# EAGLE board Big_Red_Box_Proto_Board (EAGLE 7.2.0), part 1 of 2
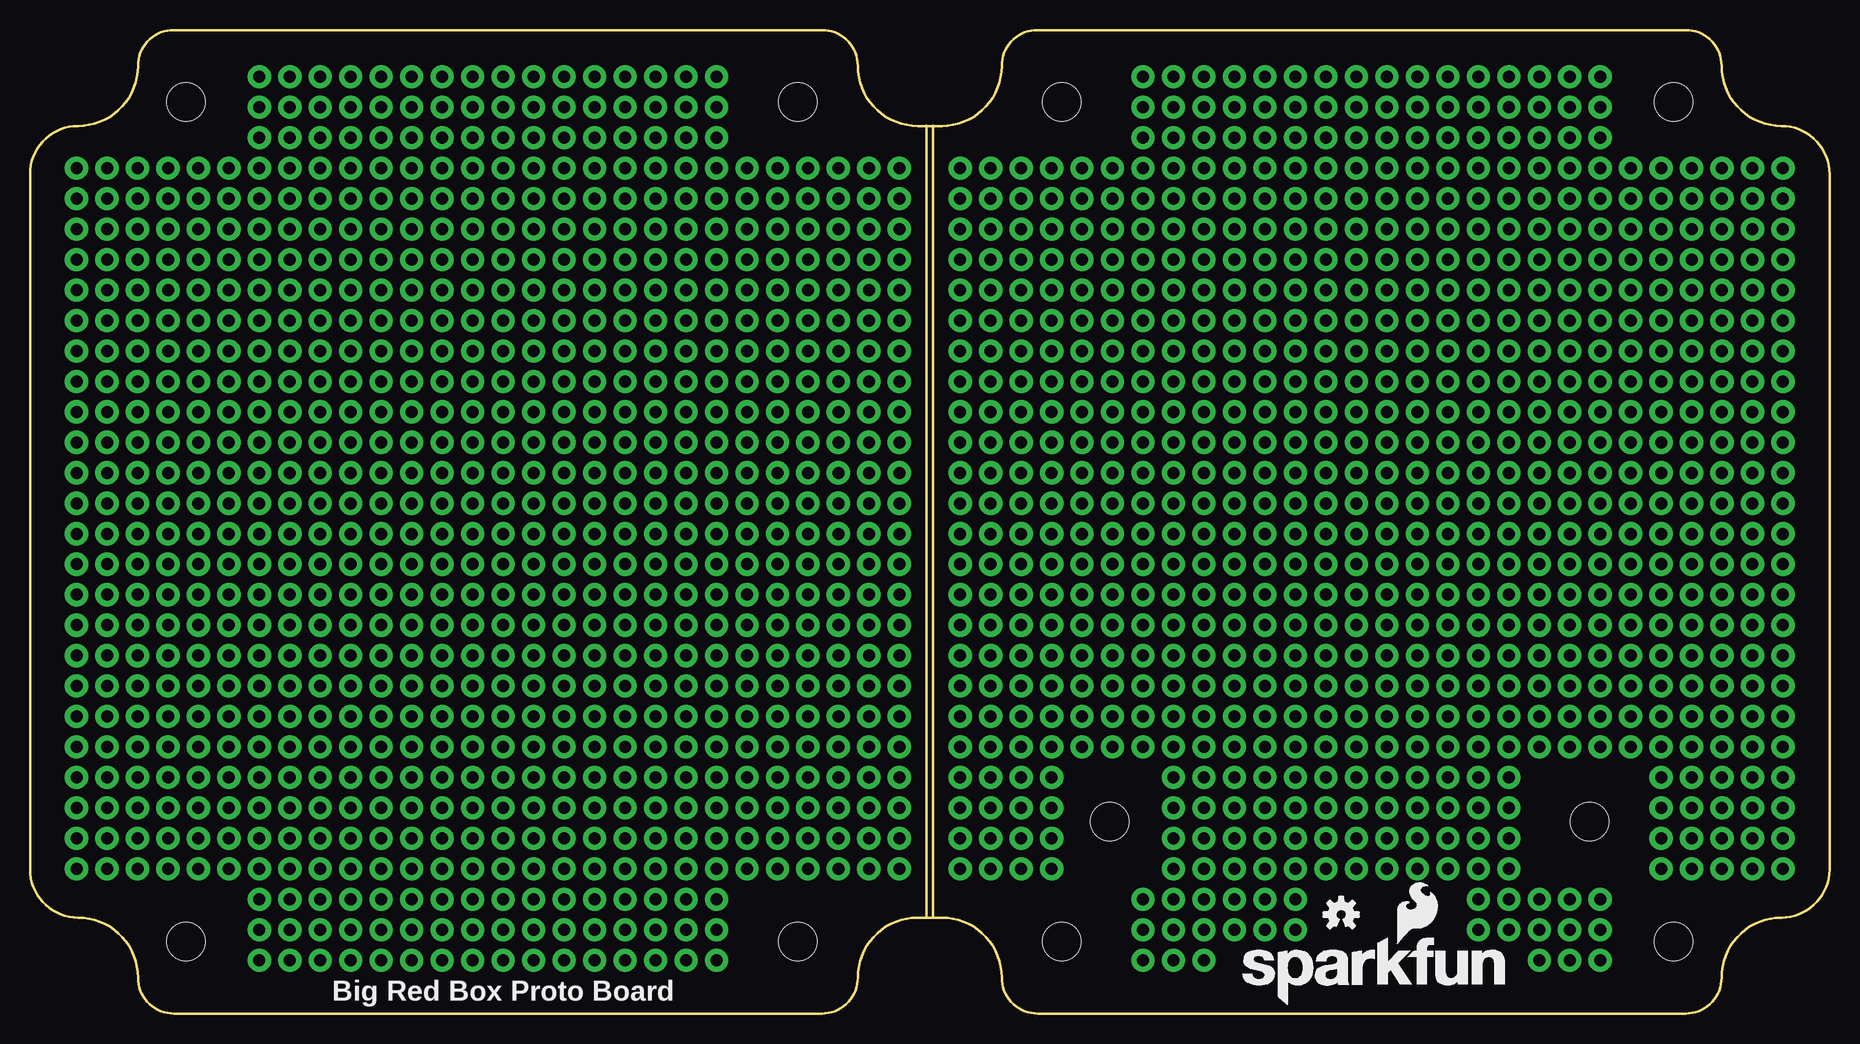
[diagram p0: board, top side]
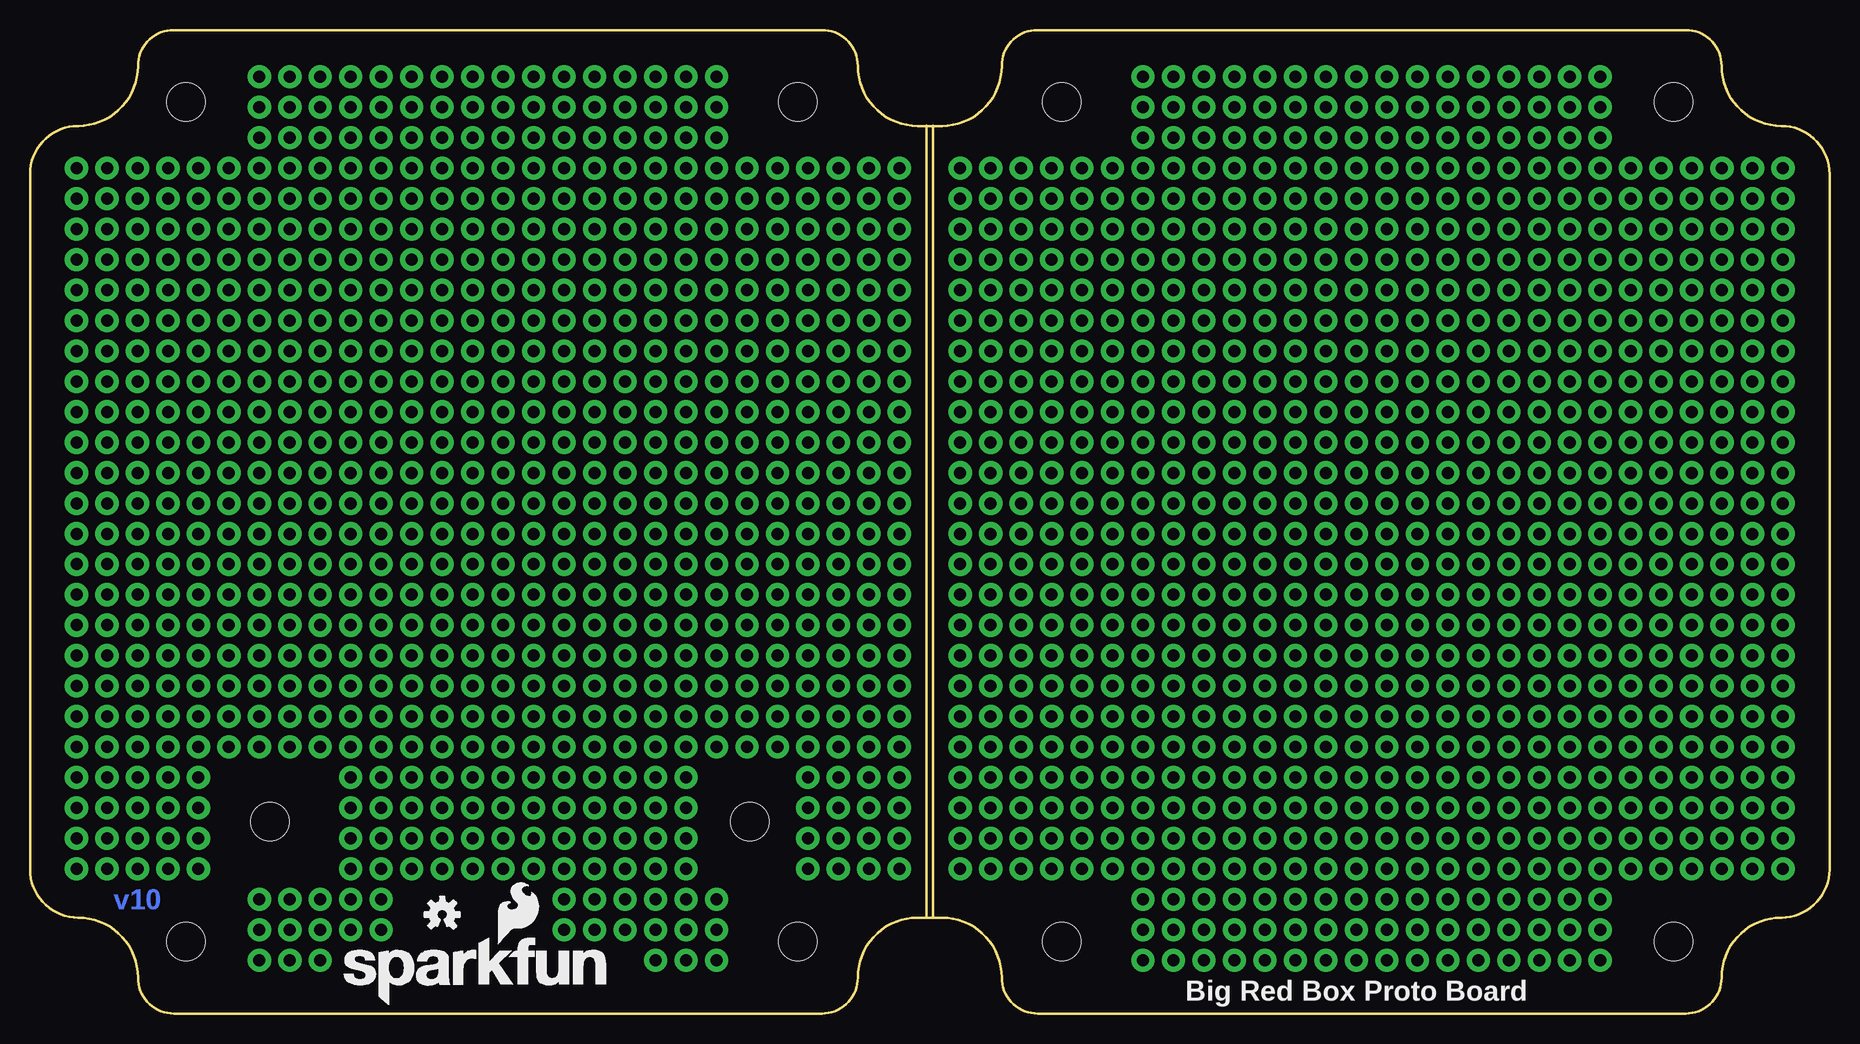
[diagram p1: board, bottom side, seen from below]

Size 150 x 82 mm. Coordinates in mm from the lower left corner, seen from the top.
Outline: 75.25,74.04 75.25,8
Outline: 74.75,74.04 74.75,8
Copper layers (1*16): Top 0.035mm / dielectric 1.5mm / Bottom 0.035mm
Design rules "default": minimum track width 10mil, minimum drill 24mil, track to track 8mil, track to pad 8mil, pad to pad 8mil, via to via 8mil, smd to smd 8mil, copper to edge 40mil, drill to drill 8mil, minimum pad ring 10mil, minimum via ring 8mil, stop-mask expansion 4mil, vias tented up to drill 0mil, thermal gap 10mil

## Footprints (pad centres in the part's own frame; a part is rotated, then mirrored left to right if it is on the bottom)
FLANGED_RED_ENCLOSURE-DIMENSION = hole 3.175: 64,6; 86,6; 137,6; 13,6; 64,76; 86,76; 137,76; 13,76; 90,16; 130,16

## Placement (x,y rotation side)
E$1  [FLANGED_RED_ENCLOSURE-DIMENSION]  0,0 0 top
E$2  [SFE_LOGO_NAME_FLAME_.2]  100.4,0.63 0 top
E$3  [SFE_LOGO_NAME_FLAME_.2]  124.53,0.63 0 bottom
E$4  [OSHW-LOGO-S]  109.29,8.25 0 top
E$5  [OSHW-LOGO-S]  115.64,8.25 0 bottom
E$6  [CREATIVE_COMMONS]  1.34,-46.36 0 top  (outside the outline)

## Library data of the parts
E$1 = SparkFun-Boards
E$2-E$6 = SparkFun-Aesthetics

## Tracks (layer width: path | path; a pad name or v marks a point on that pad's centre or on a via)
S$1  (via drill 1 pad 1.93)
  other vias: 36.9,22.22
S$2  (via drill 1 pad 1.93)
  other vias: 19.12,75.56
S$3  (via drill 1 pad 1.93)
  other vias: 19.12,73.02
S$4  (via drill 1 pad 1.93)
  other vias: 19.12,70.48
S$5  (via drill 1 pad 1.93)
  other vias: 19.12,67.94
S$6  (via drill 1 pad 1.93)
  other vias: 16.58,67.94
S$7  (via drill 1 pad 1.93)
  other vias: 14.04,67.94
S$8  (via drill 1 pad 1.93)
  other vias: 11.5,67.94
S$9  (via drill 1 pad 1.93)
  other vias: 8.96,67.94
S$10  (via drill 1 pad 1.93)
  other vias: 6.42,67.94
S$11  (via drill 1 pad 1.93)
  other vias: 3.88,67.94
S$12  (via drill 1 pad 1.93)
  other vias: 3.88,65.4
S$13  (via drill 1 pad 1.93)
  other vias: 3.88,62.86
S$14  (via drill 1 pad 1.93)
  other vias: 3.88,60.32
S$15  (via drill 1 pad 1.93)
  other vias: 3.88,57.78
S$16  (via drill 1 pad 1.93)
  other vias: 3.88,55.24
S$17  (via drill 1 pad 1.93)
  other vias: 3.88,52.7
S$18  (via drill 1 pad 1.93)
  other vias: 3.88,50.16
S$19  (via drill 1 pad 1.93)
  other vias: 3.88,47.62
S$20  (via drill 1 pad 1.93)
  other vias: 3.88,45.08
S$21  (via drill 1 pad 1.93)
  other vias: 3.88,42.54
S$22  (via drill 1 pad 1.93)
  other vias: 3.88,40
S$23  (via drill 1 pad 1.93)
  other vias: 3.88,37.46
S$24  (via drill 1 pad 1.93)
  other vias: 3.88,34.92
S$25  (via drill 1 pad 1.93)
  other vias: 3.88,32.38
S$26  (via drill 1 pad 1.93)
  other vias: 3.88,29.84
S$27  (via drill 1 pad 1.93)
  other vias: 3.88,27.3
S$28  (via drill 1 pad 1.93)
  other vias: 6.42,65.4
S$29  (via drill 1 pad 1.93)
  other vias: 6.42,62.86
S$30  (via drill 1 pad 1.93)
  other vias: 6.42,60.32
S$31  (via drill 1 pad 1.93)
  other vias: 6.42,55.24
S$32  (via drill 1 pad 1.93)
  other vias: 6.42,57.78
S$33  (via drill 1 pad 1.93)
  other vias: 8.96,65.4
S$34  (via drill 1 pad 1.93)
  other vias: 8.96,62.86
S$35  (via drill 1 pad 1.93)
  other vias: 8.96,60.32
S$36  (via drill 1 pad 1.93)
  other vias: 8.96,57.78
S$37  (via drill 1 pad 1.93)
  other vias: 8.96,55.24
S$38  (via drill 1 pad 1.93)
  other vias: 11.5,65.4
S$39  (via drill 1 pad 1.93)
  other vias: 11.5,62.86
S$40  (via drill 1 pad 1.93)
  other vias: 11.5,60.32
S$41  (via drill 1 pad 1.93)
  other vias: 11.5,57.78
S$42  (via drill 1 pad 1.93)
  other vias: 11.5,55.24
S$43  (via drill 1 pad 1.93)
  other vias: 14.04,55.24
S$44  (via drill 1 pad 1.93)
  other vias: 14.04,57.78
S$45  (via drill 1 pad 1.93)
  other vias: 14.04,62.86
S$46  (via drill 1 pad 1.93)
  other vias: 14.04,60.32
S$47  (via drill 1 pad 1.93)
  other vias: 14.04,65.4
S$48  (via drill 1 pad 1.93)
  other vias: 16.58,65.4
S$49  (via drill 1 pad 1.93)
  other vias: 19.12,65.4
S$50  (via drill 1 pad 1.93)
  other vias: 19.12,62.86
S$51  (via drill 1 pad 1.93)
  other vias: 16.58,62.86
S$52  (via drill 1 pad 1.93)
  other vias: 16.58,60.32
S$53  (via drill 1 pad 1.93)
  other vias: 19.12,60.32
S$54  (via drill 1 pad 1.93)
  other vias: 19.12,57.78
S$55  (via drill 1 pad 1.93)
  other vias: 16.58,57.78
S$56  (via drill 1 pad 1.93)
  other vias: 16.58,55.24
S$57  (via drill 1 pad 1.93)
  other vias: 19.12,55.24
S$58  (via drill 1 pad 1.93)
  other vias: 19.12,52.7
S$59  (via drill 1 pad 1.93)
  other vias: 16.58,52.7
S$60  (via drill 1 pad 1.93)
  other vias: 14.04,52.7
S$61  (via drill 1 pad 1.93)
  other vias: 11.5,52.7
S$62  (via drill 1 pad 1.93)
  other vias: 8.96,52.7
S$63  (via drill 1 pad 1.93)
  other vias: 6.42,52.7
S$64  (via drill 1 pad 1.93)
  other vias: 6.42,50.16
S$65  (via drill 1 pad 1.93)
  other vias: 8.96,50.16
S$66  (via drill 1 pad 1.93)
  other vias: 11.5,50.16
S$67  (via drill 1 pad 1.93)
  other vias: 14.04,50.16
S$68  (via drill 1 pad 1.93)
  other vias: 16.58,50.16
S$69  (via drill 1 pad 1.93)
  other vias: 19.12,50.16
S$70  (via drill 1 pad 1.93)
  other vias: 19.12,47.62
S$71  (via drill 1 pad 1.93)
  other vias: 16.58,47.62
S$72  (via drill 1 pad 1.93)
  other vias: 11.5,47.62
S$73  (via drill 1 pad 1.93)
  other vias: 14.04,47.62
S$74  (via drill 1 pad 1.93)
  other vias: 8.96,47.62
S$75  (via drill 1 pad 1.93)
  other vias: 6.42,47.62
S$76  (via drill 1 pad 1.93)
  other vias: 6.42,45.08
S$77  (via drill 1 pad 1.93)
  other vias: 11.5,45.08
S$78  (via drill 1 pad 1.93)
  other vias: 8.96,45.08
S$79  (via drill 1 pad 1.93)
  other vias: 14.04,45.08
S$80  (via drill 1 pad 1.93)
  other vias: 16.58,45.08
S$81  (via drill 1 pad 1.93)
  other vias: 19.12,45.08
S$82  (via drill 1 pad 1.93)
  other vias: 19.12,42.54
S$83  (via drill 1 pad 1.93)
  other vias: 16.58,42.54
S$84  (via drill 1 pad 1.93)
  other vias: 14.04,42.54
S$85  (via drill 1 pad 1.93)
  other vias: 11.5,42.54
S$86  (via drill 1 pad 1.93)
  other vias: 8.96,42.54
S$87  (via drill 1 pad 1.93)
  other vias: 6.42,42.54
S$88  (via drill 1 pad 1.93)
  other vias: 6.42,40
S$89  (via drill 1 pad 1.93)
  other vias: 8.96,40
S$90  (via drill 1 pad 1.93)
  other vias: 6.42,37.46
S$91  (via drill 1 pad 1.93)
  other vias: 8.96,37.46
S$92  (via drill 1 pad 1.93)
  other vias: 11.5,37.46
S$93  (via drill 1 pad 1.93)
  other vias: 14.04,40
S$94  (via drill 1 pad 1.93)
  other vias: 11.5,40
S$95  (via drill 1 pad 1.93)
  other vias: 16.58,40
S$96  (via drill 1 pad 1.93)
  other vias: 19.12,40
S$97  (via drill 1 pad 1.93)
  other vias: 19.12,37.46
S$98  (via drill 1 pad 1.93)
  other vias: 16.58,37.46
S$99  (via drill 1 pad 1.93)
  other vias: 14.04,37.46
S$100  (via drill 1 pad 1.93)
  other vias: 14.04,34.92
S$101  (via drill 1 pad 1.93)
  other vias: 16.58,34.92
S$102  (via drill 1 pad 1.93)
  other vias: 19.12,34.92
S$103  (via drill 1 pad 1.93)
  other vias: 19.12,32.38
S$104  (via drill 1 pad 1.93)
  other vias: 16.58,32.38
S$105  (via drill 1 pad 1.93)
  other vias: 14.04,32.38
S$106  (via drill 1 pad 1.93)
  other vias: 11.5,32.38
S$107  (via drill 1 pad 1.93)
  other vias: 11.5,34.92
S$108  (via drill 1 pad 1.93)
  other vias: 8.96,34.92
S$109  (via drill 1 pad 1.93)
  other vias: 8.96,32.38
S$110  (via drill 1 pad 1.93)
  other vias: 6.42,32.38
S$111  (via drill 1 pad 1.93)
  other vias: 6.42,34.92
S$112  (via drill 1 pad 1.93)
  other vias: 6.42,29.84
S$113  (via drill 1 pad 1.93)
  other vias: 6.42,27.3
S$114  (via drill 1 pad 1.93)
  other vias: 8.96,29.84
S$115  (via drill 1 pad 1.93)
  other vias: 8.96,27.3
S$116  (via drill 1 pad 1.93)
  other vias: 11.5,29.84
S$117  (via drill 1 pad 1.93)
  other vias: 11.5,27.3
S$118  (via drill 1 pad 1.93)
  other vias: 14.04,29.84
S$119  (via drill 1 pad 1.93)
  other vias: 14.04,27.3
S$120  (via drill 1 pad 1.93)
  other vias: 16.58,29.84
S$121  (via drill 1 pad 1.93)
  other vias: 16.58,27.3
S$122  (via drill 1 pad 1.93)
  other vias: 19.12,29.84
S$123  (via drill 1 pad 1.93)
  other vias: 19.12,27.3
S$124  (via drill 1 pad 1.93)
  other vias: 19.12,24.76
S$125  (via drill 1 pad 1.93)
  other vias: 16.58,24.76
S$126  (via drill 1 pad 1.93)
  other vias: 14.04,24.76
S$127  (via drill 1 pad 1.93)
  other vias: 11.5,24.76
S$128  (via drill 1 pad 1.93)
  other vias: 8.96,24.76
S$129  (via drill 1 pad 1.93)
  other vias: 6.42,24.76
S$130  (via drill 1 pad 1.93)
  other vias: 3.88,24.76
S$131  (via drill 1 pad 1.93)
  other vias: 3.88,22.22
S$132  (via drill 1 pad 1.93)
  other vias: 6.42,22.22
S$133  (via drill 1 pad 1.93)
  other vias: 8.96,22.22
S$134  (via drill 1 pad 1.93)
  other vias: 11.5,22.22
S$135  (via drill 1 pad 1.93)
  other vias: 14.04,22.22
S$136  (via drill 1 pad 1.93)
  other vias: 16.58,22.22
S$137  (via drill 1 pad 1.93)
  other vias: 19.12,22.22
S$138  (via drill 1 pad 1.93)
  other vias: 19.12,19.68
S$139  (via drill 1 pad 1.93)
  other vias: 16.58,19.68
S$140  (via drill 1 pad 1.93)
  other vias: 14.04,19.68
S$141  (via drill 1 pad 1.93)
  other vias: 11.5,19.68
S$142  (via drill 1 pad 1.93)
  other vias: 8.96,19.68
S$143  (via drill 1 pad 1.93)
  other vias: 6.42,19.68
S$144  (via drill 1 pad 1.93)
  other vias: 3.88,19.68
S$145  (via drill 1 pad 1.93)
  other vias: 3.88,17.14
S$146  (via drill 1 pad 1.93)
  other vias: 8.96,17.14
S$147  (via drill 1 pad 1.93)
  other vias: 6.42,17.14
S$148  (via drill 1 pad 1.93)
  other vias: 11.5,17.14
S$149  (via drill 1 pad 1.93)
  other vias: 14.04,17.14
S$150  (via drill 1 pad 1.93)
  other vias: 16.58,17.14
S$151  (via drill 1 pad 1.93)
  other vias: 19.12,17.14
S$152  (via drill 1 pad 1.93)
  other vias: 19.12,14.6
S$153  (via drill 1 pad 1.93)
  other vias: 16.58,14.6
S$154  (via drill 1 pad 1.93)
  other vias: 11.5,14.6
S$155  (via drill 1 pad 1.93)
  other vias: 14.04,14.6
S$156  (via drill 1 pad 1.93)
  other vias: 8.96,14.6
S$157  (via drill 1 pad 1.93)
  other vias: 6.42,14.6
S$158  (via drill 1 pad 1.93)
  other vias: 3.88,14.6
S$159  (via drill 1 pad 1.93)
  other vias: 3.88,12.06
S$160  (via drill 1 pad 1.93)
  other vias: 6.42,12.06
S$161  (via drill 1 pad 1.93)
  other vias: 8.96,12.06
S$162  (via drill 1 pad 1.93)
  other vias: 11.5,12.06
S$163  (via drill 1 pad 1.93)
  other vias: 14.04,12.06
S$164  (via drill 1 pad 1.93)
  other vias: 16.58,12.06
S$165  (via drill 1 pad 1.93)
  other vias: 19.12,12.06
S$166  (via drill 1 pad 1.93)
  other vias: 19.12,9.52
S$167  (via drill 1 pad 1.93)
  other vias: 19.12,6.98
S$168  (via drill 1 pad 1.93)
  other vias: 19.12,4.44
S$169  (via drill 1 pad 1.93)
  other vias: 29.28,4.44
S$170  (via drill 1 pad 1.93)
  other vias: 31.82,4.44
S$171  (via drill 1 pad 1.93)
  other vias: 36.9,4.44
S$172  (via drill 1 pad 1.93)
  other vias: 34.36,4.44
S$173  (via drill 1 pad 1.93)
  other vias: 24.2,4.44
S$174  (via drill 1 pad 1.93)
  other vias: 26.74,4.44
S$175  (via drill 1 pad 1.93)
  other vias: 21.66,4.44
S$176  (via drill 1 pad 1.93)
  other vias: 39.44,4.44
S$177  (via drill 1 pad 1.93)
  other vias: 41.98,4.44
S$178  (via drill 1 pad 1.93)
  other vias: 44.52,4.44
S$179  (via drill 1 pad 1.93)
  other vias: 47.06,4.44
S$180  (via drill 1 pad 1.93)
  other vias: 49.6,4.44
S$181  (via drill 1 pad 1.93)
  other vias: 52.14,4.44
S$182  (via drill 1 pad 1.93)
  other vias: 54.68,4.44
S$183  (via drill 1 pad 1.93)
  other vias: 57.22,4.44
S$184  (via drill 1 pad 1.93)
  other vias: 57.22,6.98
S$185  (via drill 1 pad 1.93)
  other vias: 57.22,9.52
S$186  (via drill 1 pad 1.93)
  other vias: 57.22,12.06
S$187  (via drill 1 pad 1.93)
  other vias: 59.76,12.06
S$188  (via drill 1 pad 1.93)
  other vias: 62.3,12.06
S$189  (via drill 1 pad 1.93)
  other vias: 64.84,12.06
S$190  (via drill 1 pad 1.93)
  other vias: 69.92,12.06
S$191  (via drill 1 pad 1.93)
  other vias: 67.38,12.06
S$192  (via drill 1 pad 1.93)
  other vias: 72.46,12.06
S$193  (via drill 1 pad 1.93)
  other vias: 85.16,19.68
S$194  (via drill 1 pad 1.93)
  other vias: 77.54,12.06
S$195  (via drill 1 pad 1.93)
  other vias: 80.08,12.06
S$196  (via drill 1 pad 1.93)
  other vias: 85.16,12.06
S$197  (via drill 1 pad 1.93)
  other vias: 82.62,12.06
S$201  (via drill 1 pad 1.93)
  other vias: 95.32,9.52
S$202  (via drill 1 pad 1.93)
  other vias: 92.78,9.52
S$203  (via drill 1 pad 1.93)
  other vias: 92.78,6.98
S$204  (via drill 1 pad 1.93)
  other vias: 92.78,4.44
S$205  (via drill 1 pad 1.93)
  other vias: 95.32,4.44
S$206  (via drill 1 pad 1.93)
  other vias: 97.86,4.44
S$207  (via drill 1 pad 1.93)
  other vias: 95.32,6.98
S$208  (via drill 1 pad 1.93)
  other vias: 97.86,6.98
S$209  (via drill 1 pad 1.93)
  other vias: 97.86,9.52
S$210  (via drill 1 pad 1.93)
  other vias: 97.86,12.06
S$211  (via drill 1 pad 1.93)
  other vias: 95.32,12.06
S$212  (via drill 1 pad 1.93)
  other vias: 54.68,6.98
S$213  (via drill 1 pad 1.93)
  other vias: 54.68,9.52
S$214  (via drill 1 pad 1.93)
  other vias: 54.68,12.06
S$215  (via drill 1 pad 1.93)
  other vias: 52.14,12.06
S$216  (via drill 1 pad 1.93)
  other vias: 52.14,9.52
S$217  (via drill 1 pad 1.93)
  other vias: 52.14,6.98
S$218  (via drill 1 pad 1.93)
  other vias: 49.6,6.98
S$219  (via drill 1 pad 1.93)
  other vias: 49.6,9.52
S$220  (via drill 1 pad 1.93)
  other vias: 49.6,12.06
S$221  (via drill 1 pad 1.93)
  other vias: 49.6,14.6
S$222  (via drill 1 pad 1.93)
  other vias: 52.14,14.6
S$223  (via drill 1 pad 1.93)
  other vias: 54.68,14.6
S$224  (via drill 1 pad 1.93)
  other vias: 59.76,14.6
S$225  (via drill 1 pad 1.93)
  other vias: 64.84,14.6
S$226  (via drill 1 pad 1.93)
  other vias: 69.92,14.6
S$227  (via drill 1 pad 1.93)
  other vias: 72.46,14.6
S$228  (via drill 1 pad 1.93)
  other vias: 80.08,14.6
S$229  (via drill 1 pad 1.93)
  other vias: 57.22,14.6
S$230  (via drill 1 pad 1.93)
  other vias: 62.3,14.6
S$231  (via drill 1 pad 1.93)
  other vias: 67.38,14.6
S$233  (via drill 1 pad 1.93)
  other vias: 77.54,14.6
S$234  (via drill 1 pad 1.93)
  other vias: 82.62,14.6
S$235  (via drill 1 pad 1.93)
  other vias: 82.62,17.14
S$236  (via drill 1 pad 1.93)
  other vias: 82.62,19.68
S$237  (via drill 1 pad 1.93)
  other vias: 82.62,22.22
S$238  (via drill 1 pad 1.93)
  other vias: 85.16,22.22
S$239  (via drill 1 pad 1.93)
  other vias: 87.7,22.22
S$240  (via drill 1 pad 1.93)
  other vias: 90.24,22.22
S$241  (via drill 1 pad 1.93)
  other vias: 92.78,22.22
S$242  (via drill 1 pad 1.93)
  other vias: 95.32,22.22
S$243  (via drill 1 pad 1.93)
  other vias: 95.32,19.68
S$244  (via drill 1 pad 1.93)
  other vias: 95.32,17.14
S$245  (via drill 1 pad 1.93)
  other vias: 95.32,14.6
S$246  (via drill 1 pad 1.93)
  other vias: 97.86,14.6
S$247  (via drill 1 pad 1.93)
  other vias: 97.86,17.14
S$248  (via drill 1 pad 1.93)
  other vias: 97.86,19.68
S$249  (via drill 1 pad 1.93)
  other vias: 97.86,22.22
S$250  (via drill 1 pad 1.93)
  other vias: 100.4,22.22
S$251  (via drill 1 pad 1.93)
  other vias: 100.4,19.68
S$252  (via drill 1 pad 1.93)
  other vias: 100.4,17.14
S$253  (via drill 1 pad 1.93)
  other vias: 100.4,14.6
S$254  (via drill 1 pad 1.93)
  other vias: 100.4,12.06
S$255  (via drill 1 pad 1.93)
  other vias: 100.4,9.52
S$256  (via drill 1 pad 1.93)
  other vias: 102.94,9.52
S$257  (via drill 1 pad 1.93)
  other vias: 102.94,12.06
S$258  (via drill 1 pad 1.93)
  other vias: 102.94,14.6
S$259  (via drill 1 pad 1.93)
  other vias: 102.94,17.14
S$260  (via drill 1 pad 1.93)
  other vias: 102.94,19.68
S$261  (via drill 1 pad 1.93)
  other vias: 102.94,22.22
S$262  (via drill 1 pad 1.93)
  other vias: 102.94,24.76
S$263  (via drill 1 pad 1.93)
  other vias: 100.4,24.76
S$264  (via drill 1 pad 1.93)
  other vias: 97.86,24.76
S$265  (via drill 1 pad 1.93)
  other vias: 95.32,24.76
S$266  (via drill 1 pad 1.93)
  other vias: 92.78,24.76
S$267  (via drill 1 pad 1.93)
  other vias: 90.24,24.76
S$268  (via drill 1 pad 1.93)
  other vias: 82.62,24.76
S$269  (via drill 1 pad 1.93)
  other vias: 85.16,24.76
S$270  (via drill 1 pad 1.93)
  other vias: 87.7,24.76
S$271  (via drill 1 pad 1.93)
  other vias: 80.08,24.76
S$272  (via drill 1 pad 1.93)
  other vias: 80.08,22.22
S$273  (via drill 1 pad 1.93)
  other vias: 80.08,19.68
S$274  (via drill 1 pad 1.93)
  other vias: 80.08,17.14
S$275  (via drill 1 pad 1.93)
  other vias: 77.54,24.76
S$276  (via drill 1 pad 1.93)
  other vias: 77.54,22.22
S$277  (via drill 1 pad 1.93)
  other vias: 77.54,19.68
S$278  (via drill 1 pad 1.93)
  other vias: 77.54,17.14
S$279  (via drill 1 pad 1.93)
  other vias: 100.4,6.98
S$280  (via drill 1 pad 1.93)
  other vias: 102.94,6.98
S$291  (via drill 1 pad 1.93)
  other vias: 125.8,4.44
S$292  (via drill 1 pad 1.93)
  other vias: 130.88,4.44
S$293  (via drill 1 pad 1.93)
  other vias: 128.34,4.44
S$294  (via drill 1 pad 1.93)
  other vias: 130.88,6.98
S$295  (via drill 1 pad 1.93)
  other vias: 130.88,9.52
S$298  (via drill 1 pad 1.93)
  other vias: 135.96,12.06
S$299  (via drill 1 pad 1.93)
  other vias: 138.5,12.06
S$300  (via drill 1 pad 1.93)
  other vias: 141.04,12.06
S$301  (via drill 1 pad 1.93)
  other vias: 143.58,12.06
S$302  (via drill 1 pad 1.93)
  other vias: 146.12,12.06
S$303  (via drill 1 pad 1.93)
  other vias: 146.12,14.6
S$304  (via drill 1 pad 1.93)
  other vias: 146.12,17.14
S$305  (via drill 1 pad 1.93)
  other vias: 146.12,19.68
S$306  (via drill 1 pad 1.93)
  other vias: 143.58,14.6
S$307  (via drill 1 pad 1.93)
  other vias: 143.58,17.14
S$308  (via drill 1 pad 1.93)
  other vias: 141.04,19.68
S$309  (via drill 1 pad 1.93)
  other vias: 143.58,19.68
S$310  (via drill 1 pad 1.93)
  other vias: 141.04,17.14
S$311  (via drill 1 pad 1.93)
  other vias: 141.04,14.6
S$312  (via drill 1 pad 1.93)
  other vias: 138.5,14.6
S$313  (via drill 1 pad 1.93)
  other vias: 138.5,17.14
S$314  (via drill 1 pad 1.93)
  other vias: 138.5,19.68
S$315  (via drill 1 pad 1.93)
  other vias: 135.96,19.68
S$316  (via drill 1 pad 1.93)
  other vias: 135.96,17.14
S$317  (via drill 1 pad 1.93)
  other vias: 135.96,14.6
S$318  (via drill 1 pad 1.93)
  other vias: 135.96,22.22
S$319  (via drill 1 pad 1.93)
  other vias: 133.42,22.22
S$320  (via drill 1 pad 1.93)
  other vias: 130.88,22.22
S$321  (via drill 1 pad 1.93)
  other vias: 128.34,22.22
S$322  (via drill 1 pad 1.93)
  other vias: 123.26,22.22
S$323  (via drill 1 pad 1.93)
  other vias: 125.8,22.22
S$324  (via drill 1 pad 1.93)
  other vias: 138.5,22.22
S$325  (via drill 1 pad 1.93)
  other vias: 141.04,22.22
S$326  (via drill 1 pad 1.93)
  other vias: 143.58,22.22
S$327  (via drill 1 pad 1.93)
  other vias: 146.12,22.22
S$328  (via drill 1 pad 1.93)
  other vias: 146.12,24.76
S$329  (via drill 1 pad 1.93)
  other vias: 146.12,27.3
S$330  (via drill 1 pad 1.93)
  other vias: 146.12,29.84
S$331  (via drill 1 pad 1.93)
  other vias: 146.12,32.38
S$332  (via drill 1 pad 1.93)
  other vias: 146.12,34.92
S$333  (via drill 1 pad 1.93)
  other vias: 146.12,37.46
S$334  (via drill 1 pad 1.93)
  other vias: 146.12,40
S$335  (via drill 1 pad 1.93)
  other vias: 146.12,42.54
S$336  (via drill 1 pad 1.93)
  other vias: 146.12,45.08
S$337  (via drill 1 pad 1.93)
  other vias: 146.12,47.62
S$338  (via drill 1 pad 1.93)
  other vias: 143.58,50.16
S$339  (via drill 1 pad 1.93)
  other vias: 146.12,50.16
S$340  (via drill 1 pad 1.93)
  other vias: 146.12,52.7
S$341  (via drill 1 pad 1.93)
  other vias: 146.12,57.78
S$342  (via drill 1 pad 1.93)
  other vias: 146.12,55.24
S$343  (via drill 1 pad 1.93)
  other vias: 143.58,55.24
S$344  (via drill 1 pad 1.93)
  other vias: 143.58,52.7
S$345  (via drill 1 pad 1.93)
  other vias: 143.58,47.62
S$346  (via drill 1 pad 1.93)
  other vias: 143.58,45.08
S$347  (via drill 1 pad 1.93)
  other vias: 143.58,42.54
S$348  (via drill 1 pad 1.93)
  other vias: 143.58,40
S$349  (via drill 1 pad 1.93)
  other vias: 143.58,34.92
S$350  (via drill 1 pad 1.93)
  other vias: 143.58,32.38
S$351  (via drill 1 pad 1.93)
  other vias: 143.58,29.84
S$352  (via drill 1 pad 1.93)
  other vias: 143.58,27.3
S$353  (via drill 1 pad 1.93)
  other vias: 143.58,24.76
S$354  (via drill 1 pad 1.93)
  other vias: 141.04,24.76
S$355  (via drill 1 pad 1.93)
  other vias: 141.04,27.3
S$356  (via drill 1 pad 1.93)
  other vias: 141.04,29.84
S$357  (via drill 1 pad 1.93)
  other vias: 141.04,34.92
S$358  (via drill 1 pad 1.93)
  other vias: 141.04,37.46
S$359  (via drill 1 pad 1.93)
  other vias: 143.58,37.46
S$360  (via drill 1 pad 1.93)
  other vias: 141.04,32.38
S$361  (via drill 1 pad 1.93)
  other vias: 141.04,40
S$362  (via drill 1 pad 1.93)
  other vias: 141.04,42.54
S$363  (via drill 1 pad 1.93)
  other vias: 141.04,50.16
S$364  (via drill 1 pad 1.93)
  other vias: 102.94,27.3
S$365  (via drill 1 pad 1.93)
  other vias: 138.5,24.76
S$366  (via drill 1 pad 1.93)
  other vias: 135.96,24.76
S$367  (via drill 1 pad 1.93)
  other vias: 133.42,24.76
S$368  (via drill 1 pad 1.93)
  other vias: 130.88,24.76
S$369  (via drill 1 pad 1.93)
  other vias: 128.34,24.76
S$370  (via drill 1 pad 1.93)
  other vias: 123.26,24.76
S$371  (via drill 1 pad 1.93)
  other vias: 125.8,24.76
S$372  (via drill 1 pad 1.93)
  other vias: 123.26,27.3
S$373  (via drill 1 pad 1.93)
  other vias: 125.8,27.3
S$374  (via drill 1 pad 1.93)
  other vias: 128.34,27.3
S$375  (via drill 1 pad 1.93)
  other vias: 130.88,27.3
S$376  (via drill 1 pad 1.93)
  other vias: 133.42,27.3
S$377  (via drill 1 pad 1.93)
  other vias: 135.96,27.3
S$378  (via drill 1 pad 1.93)
  other vias: 138.5,27.3
S$379  (via drill 1 pad 1.93)
  other vias: 138.5,29.84
S$380  (via drill 1 pad 1.93)
  other vias: 138.5,32.38
S$381  (via drill 1 pad 1.93)
  other vias: 138.5,37.46
S$382  (via drill 1 pad 1.93)
  other vias: 138.5,34.92
S$383  (via drill 1 pad 1.93)
  other vias: 138.5,40
S$384  (via drill 1 pad 1.93)
  other vias: 138.5,42.54
S$385  (via drill 1 pad 1.93)
  other vias: 108.02,22.22
S$386  (via drill 1 pad 1.93)
  other vias: 105.48,22.22
S$387  (via drill 1 pad 1.93)
  other vias: 110.56,22.22
S$388  (via drill 1 pad 1.93)
  other vias: 113.1,22.22
S$389  (via drill 1 pad 1.93)
  other vias: 115.64,22.22
S$390  (via drill 1 pad 1.93)
  other vias: 118.18,22.22
S$391  (via drill 1 pad 1.93)
  other vias: 120.72,22.22
S$392  (via drill 1 pad 1.93)
  other vias: 120.72,19.68
S$393  (via drill 1 pad 1.93)
  other vias: 120.72,14.6
S$394  (via drill 1 pad 1.93)
  other vias: 120.72,17.14
S$395  (via drill 1 pad 1.93)
  other vias: 123.26,19.68
S$396  (via drill 1 pad 1.93)
  other vias: 123.26,17.14
S$397  (via drill 1 pad 1.93)
  other vias: 123.26,14.6
S$398  (via drill 1 pad 1.93)
  other vias: 123.26,12.06
S$399  (via drill 1 pad 1.93)
  other vias: 123.26,9.52
S$400  (via drill 1 pad 1.93)
  other vias: 123.26,6.98
S$401  (via drill 1 pad 1.93)
  other vias: 125.8,6.98
S$402  (via drill 1 pad 1.93)
  other vias: 128.34,6.98
S$403  (via drill 1 pad 1.93)
  other vias: 128.34,9.52
S$404  (via drill 1 pad 1.93)
  other vias: 125.8,9.52
S$407  (via drill 1 pad 1.93)
  other vias: 105.48,19.68
S$408  (via drill 1 pad 1.93)
  other vias: 110.56,19.68
S$409  (via drill 1 pad 1.93)
  other vias: 115.64,19.68
S$410  (via drill 1 pad 1.93)
  other vias: 118.18,19.68
S$411  (via drill 1 pad 1.93)
  other vias: 118.18,17.14
S$412  (via drill 1 pad 1.93)
  other vias: 108.02,17.14
S$413  (via drill 1 pad 1.93)
  other vias: 113.1,17.14
S$414  (via drill 1 pad 1.93)
  other vias: 115.64,14.6
S$415  (via drill 1 pad 1.93)
  other vias: 115.64,12.06
S$417  (via drill 1 pad 1.93)
  other vias: 105.48,14.6
S$418  (via drill 1 pad 1.93)
  other vias: 110.56,12.06
S$421  (via drill 1 pad 1.93)
  other vias: 105.48,6.98
S$427  (via drill 1 pad 1.93)
  other vias: 120.72,6.98
S$428  (via drill 1 pad 1.93)
  other vias: 120.72,9.52
S$429  (via drill 1 pad 1.93)
  other vias: 120.72,12.06
S$431  (via drill 1 pad 1.93)
  other vias: 118.18,12.06
S$432  (via drill 1 pad 1.93)
  other vias: 118.18,14.6
S$433  (via drill 1 pad 1.93)
  other vias: 115.64,17.14
S$434  (via drill 1 pad 1.93)
  other vias: 113.1,19.68
S$435  (via drill 1 pad 1.93)
  other vias: 108.02,19.68
S$436  (via drill 1 pad 1.93)
  other vias: 105.48,17.14
S$437  (via drill 1 pad 1.93)
  other vias: 110.56,17.14
S$438  (via drill 1 pad 1.93)
  other vias: 108.02,14.6
S$439  (via drill 1 pad 1.93)
  other vias: 105.48,12.06
S$440  (via drill 1 pad 1.93)
  other vias: 105.48,9.52
S$441  (via drill 1 pad 1.93)
  other vias: 108.02,12.06
S$442  (via drill 1 pad 1.93)
  other vias: 110.56,14.6
S$443  (via drill 1 pad 1.93)
  other vias: 113.1,14.6
S$444  (via drill 1 pad 1.93)
  other vias: 113.1,12.06
S$446  (via drill 1 pad 1.93)
  other vias: 120.72,24.76
S$447  (via drill 1 pad 1.93)
  other vias: 120.72,27.3
S$448  (via drill 1 pad 1.93)
  other vias: 118.18,27.3
S$449  (via drill 1 pad 1.93)
  other vias: 118.18,24.76
S$450  (via drill 1 pad 1.93)
  other vias: 115.64,24.76
S$451  (via drill 1 pad 1.93)
  other vias: 115.64,27.3
S$452  (via drill 1 pad 1.93)
  other vias: 113.1,27.3
S$453  (via drill 1 pad 1.93)
  other vias: 113.1,24.76
S$454  (via drill 1 pad 1.93)
  other vias: 110.56,24.76
S$455  (via drill 1 pad 1.93)
  other vias: 108.02,24.76
S$456  (via drill 1 pad 1.93)
  other vias: 105.48,24.76
S$457  (via drill 1 pad 1.93)
  other vias: 105.48,27.3
S$458  (via drill 1 pad 1.93)
  other vias: 108.02,27.3
S$459  (via drill 1 pad 1.93)
  other vias: 110.56,27.3
S$460  (via drill 1 pad 1.93)
  other vias: 135.96,29.84
S$461  (via drill 1 pad 1.93)
  other vias: 133.42,29.84
S$462  (via drill 1 pad 1.93)
  other vias: 130.88,29.84
S$463  (via drill 1 pad 1.93)
  other vias: 130.88,32.38
S$464  (via drill 1 pad 1.93)
  other vias: 133.42,32.38
S$465  (via drill 1 pad 1.93)
  other vias: 135.96,32.38
S$466  (via drill 1 pad 1.93)
  other vias: 135.96,34.92
S$467  (via drill 1 pad 1.93)
  other vias: 133.42,34.92
S$468  (via drill 1 pad 1.93)
  other vias: 130.88,34.92
S$469  (via drill 1 pad 1.93)
  other vias: 130.88,37.46
S$470  (via drill 1 pad 1.93)
  other vias: 133.42,37.46
S$471  (via drill 1 pad 1.93)
  other vias: 135.96,37.46
S$472  (via drill 1 pad 1.93)
  other vias: 135.96,40
S$473  (via drill 1 pad 1.93)
  other vias: 133.42,40
S$474  (via drill 1 pad 1.93)
  other vias: 128.34,40
S$475  (via drill 1 pad 1.93)
  other vias: 130.88,40
S$476  (via drill 1 pad 1.93)
  other vias: 130.88,42.54
S$477  (via drill 1 pad 1.93)
  other vias: 133.42,42.54
S$478  (via drill 1 pad 1.93)
  other vias: 135.96,42.54
S$479  (via drill 1 pad 1.93)
  other vias: 141.04,45.08
S$480  (via drill 1 pad 1.93)
  other vias: 141.04,47.62
S$481  (via drill 1 pad 1.93)
  other vias: 138.5,47.62
S$482  (via drill 1 pad 1.93)
  other vias: 138.5,45.08
S$483  (via drill 1 pad 1.93)
  other vias: 135.96,45.08
S$484  (via drill 1 pad 1.93)
  other vias: 135.96,47.62
S$485  (via drill 1 pad 1.93)
  other vias: 135.96,50.16
S$486  (via drill 1 pad 1.93)
  other vias: 138.5,50.16
S$487  (via drill 1 pad 1.93)
  other vias: 141.04,52.7
S$488  (via drill 1 pad 1.93)
  other vias: 138.5,52.7
S$489  (via drill 1 pad 1.93)
  other vias: 135.96,52.7
S$490  (via drill 1 pad 1.93)
  other vias: 133.42,50.16
S$491  (via drill 1 pad 1.93)
  other vias: 133.42,47.62
S$492  (via drill 1 pad 1.93)
  other vias: 133.42,45.08
S$493  (via drill 1 pad 1.93)
  other vias: 130.88,45.08
S$494  (via drill 1 pad 1.93)
  other vias: 128.34,42.54
S$495  (via drill 1 pad 1.93)
  other vias: 128.34,34.92
S$496  (via drill 1 pad 1.93)
  other vias: 128.34,37.46
S$497  (via drill 1 pad 1.93)
  other vias: 128.34,32.38
S$498  (via drill 1 pad 1.93)
  other vias: 128.34,29.84
S$499  (via drill 1 pad 1.93)
  other vias: 125.8,42.54
S$500  (via drill 1 pad 1.93)
  other vias: 125.8,40
S$501  (via drill 1 pad 1.93)
  other vias: 125.8,37.46
S$502  (via drill 1 pad 1.93)
  other vias: 125.8,32.38
S$503  (via drill 1 pad 1.93)
  other vias: 125.8,29.84
S$504  (via drill 1 pad 1.93)
  other vias: 125.8,34.92
S$505  (via drill 1 pad 1.93)
  other vias: 123.26,42.54
S$506  (via drill 1 pad 1.93)
  other vias: 123.26,37.46
S$507  (via drill 1 pad 1.93)
  other vias: 123.26,40
S$508  (via drill 1 pad 1.93)
  other vias: 123.26,34.92
S$509  (via drill 1 pad 1.93)
  other vias: 123.26,32.38
S$510  (via drill 1 pad 1.93)
  other vias: 123.26,29.84
S$511  (via drill 1 pad 1.93)
  other vias: 120.72,29.84
S$512  (via drill 1 pad 1.93)
  other vias: 120.72,32.38
S$513  (via drill 1 pad 1.93)
  other vias: 120.72,34.92
S$514  (via drill 1 pad 1.93)
  other vias: 120.72,37.46
S$515  (via drill 1 pad 1.93)
  other vias: 120.72,40
S$516  (via drill 1 pad 1.93)
  other vias: 120.72,42.54
S$517  (via drill 1 pad 1.93)
  other vias: 118.18,42.54
S$518  (via drill 1 pad 1.93)
  other vias: 118.18,40
S$519  (via drill 1 pad 1.93)
  other vias: 118.18,37.46
S$520  (via drill 1 pad 1.93)
  other vias: 118.18,34.92
S$521  (via drill 1 pad 1.93)
  other vias: 118.18,32.38
S$522  (via drill 1 pad 1.93)
  other vias: 118.18,29.84
S$523  (via drill 1 pad 1.93)
  other vias: 115.64,29.84
S$524  (via drill 1 pad 1.93)
  other vias: 115.64,32.38
S$525  (via drill 1 pad 1.93)
  other vias: 115.64,34.92
S$526  (via drill 1 pad 1.93)
  other vias: 115.64,37.46
S$527  (via drill 1 pad 1.93)
  other vias: 115.64,40
S$528  (via drill 1 pad 1.93)
  other vias: 115.64,42.54
S$529  (via drill 1 pad 1.93)
  other vias: 113.1,42.54
S$530  (via drill 1 pad 1.93)
  other vias: 113.1,40
S$531  (via drill 1 pad 1.93)
  other vias: 113.1,37.46
S$532  (via drill 1 pad 1.93)
  other vias: 113.1,34.92
S$533  (via drill 1 pad 1.93)
  other vias: 113.1,32.38
S$534  (via drill 1 pad 1.93)
  other vias: 113.1,29.84
S$535  (via drill 1 pad 1.93)
  other vias: 110.56,29.84
S$536  (via drill 1 pad 1.93)
  other vias: 110.56,32.38
S$537  (via drill 1 pad 1.93)
  other vias: 110.56,34.92
S$538  (via drill 1 pad 1.93)
  other vias: 110.56,37.46
S$539  (via drill 1 pad 1.93)
  other vias: 110.56,40
S$540  (via drill 1 pad 1.93)
  other vias: 110.56,42.54
S$541  (via drill 1 pad 1.93)
  other vias: 108.02,42.54
S$542  (via drill 1 pad 1.93)
  other vias: 108.02,40
S$543  (via drill 1 pad 1.93)
  other vias: 108.02,37.46
S$544  (via drill 1 pad 1.93)
  other vias: 108.02,34.92
S$545  (via drill 1 pad 1.93)
  other vias: 108.02,32.38
S$546  (via drill 1 pad 1.93)
  other vias: 108.02,29.84
S$547  (via drill 1 pad 1.93)
  other vias: 105.48,29.84
S$548  (via drill 1 pad 1.93)
  other vias: 105.48,32.38
S$549  (via drill 1 pad 1.93)
  other vias: 105.48,34.92
S$550  (via drill 1 pad 1.93)
  other vias: 105.48,37.46
S$551  (via drill 1 pad 1.93)
  other vias: 105.48,40
S$552  (via drill 1 pad 1.93)
  other vias: 105.48,42.54
S$553  (via drill 1 pad 1.93)
  other vias: 102.94,42.54
S$554  (via drill 1 pad 1.93)
  other vias: 102.94,37.46
S$555  (via drill 1 pad 1.93)
  other vias: 102.94,34.92
S$556  (via drill 1 pad 1.93)
  other vias: 102.94,32.38
S$557  (via drill 1 pad 1.93)
  other vias: 102.94,29.84
S$558  (via drill 1 pad 1.93)
  other vias: 102.94,40
S$559  (via drill 1 pad 1.93)
  other vias: 102.94,45.08
S$560  (via drill 1 pad 1.93)
  other vias: 105.48,45.08
S$561  (via drill 1 pad 1.93)
  other vias: 108.02,45.08
S$562  (via drill 1 pad 1.93)
  other vias: 110.56,45.08
S$563  (via drill 1 pad 1.93)
  other vias: 115.64,45.08
S$564  (via drill 1 pad 1.93)
  other vias: 118.18,45.08
S$565  (via drill 1 pad 1.93)
  other vias: 123.26,45.08
S$566  (via drill 1 pad 1.93)
  other vias: 125.8,45.08
S$567  (via drill 1 pad 1.93)
  other vias: 128.34,45.08
S$568  (via drill 1 pad 1.93)
  other vias: 120.72,45.08
S$569  (via drill 1 pad 1.93)
  other vias: 113.1,45.08
S$570  (via drill 1 pad 1.93)
  other vias: 130.88,47.62
S$571  (via drill 1 pad 1.93)
  other vias: 130.88,50.16
S$572  (via drill 1 pad 1.93)
  other vias: 128.34,50.16
S$573  (via drill 1 pad 1.93)
  other vias: 128.34,47.62
S$574  (via drill 1 pad 1.93)
  other vias: 125.8,47.62
S$575  (via drill 1 pad 1.93)
  other vias: 125.8,50.16
S$576  (via drill 1 pad 1.93)
  other vias: 123.26,50.16
S$577  (via drill 1 pad 1.93)
  other vias: 123.26,47.62
S$578  (via drill 1 pad 1.93)
  other vias: 120.72,47.62
S$579  (via drill 1 pad 1.93)
  other vias: 118.18,50.16
S$580  (via drill 1 pad 1.93)
  other vias: 120.72,50.16
S$581  (via drill 1 pad 1.93)
  other vias: 118.18,47.62
S$582  (via drill 1 pad 1.93)
  other vias: 115.64,47.62
S$583  (via drill 1 pad 1.93)
  other vias: 115.64,50.16
S$584  (via drill 1 pad 1.93)
  other vias: 113.1,50.16
S$585  (via drill 1 pad 1.93)
  other vias: 113.1,47.62
S$586  (via drill 1 pad 1.93)
  other vias: 110.56,47.62
S$587  (via drill 1 pad 1.93)
  other vias: 110.56,50.16
S$588  (via drill 1 pad 1.93)
  other vias: 108.02,50.16
S$589  (via drill 1 pad 1.93)
  other vias: 108.02,47.62
S$590  (via drill 1 pad 1.93)
  other vias: 105.48,47.62
S$591  (via drill 1 pad 1.93)
  other vias: 105.48,50.16
S$592  (via drill 1 pad 1.93)
  other vias: 102.94,50.16
S$593  (via drill 1 pad 1.93)
  other vias: 102.94,47.62
S$594  (via drill 1 pad 1.93)
  other vias: 102.94,52.7
S$595  (via drill 1 pad 1.93)
  other vias: 108.02,52.7
S$596  (via drill 1 pad 1.93)
  other vias: 110.56,52.7
S$597  (via drill 1 pad 1.93)
  other vias: 115.64,52.7
S$598  (via drill 1 pad 1.93)
  other vias: 118.18,52.7
S$599  (via drill 1 pad 1.93)
  other vias: 120.72,52.7
S$600  (via drill 1 pad 1.93)
  other vias: 123.26,52.7
S$601  (via drill 1 pad 1.93)
  other vias: 125.8,52.7
S$602  (via drill 1 pad 1.93)
  other vias: 128.34,52.7
S$603  (via drill 1 pad 1.93)
  other vias: 21.66,6.98
S$604  (via drill 1 pad 1.93)
  other vias: 21.66,9.52
S$605  (via drill 1 pad 1.93)
  other vias: 21.66,12.06
S$606  (via drill 1 pad 1.93)
  other vias: 21.66,14.6
S$607  (via drill 1 pad 1.93)
  other vias: 21.66,17.14
S$608  (via drill 1 pad 1.93)
  other vias: 24.2,17.14
S$609  (via drill 1 pad 1.93)
  other vias: 34.36,17.14
S$610  (via drill 1 pad 1.93)
  other vias: 39.44,17.14
S$611  (via drill 1 pad 1.93)
  other vias: 47.06,17.14
S$612  (via drill 1 pad 1.93)
  other vias: 52.14,17.14
S$613  (via drill 1 pad 1.93)
  other vias: 57.22,17.14
S$614  (via drill 1 pad 1.93)
  other vias: 64.84,17.14
S$615  (via drill 1 pad 1.93)
  other vias: 67.38,17.14
S$616  (via drill 1 pad 1.93)
  other vias: 72.46,17.14
S$618  (via drill 1 pad 1.93)
  other vias: 69.92,17.14
S$619  (via drill 1 pad 1.93)
  other vias: 26.74,17.14
S$620  (via drill 1 pad 1.93)
  other vias: 29.28,17.14
S$621  (via drill 1 pad 1.93)
  other vias: 31.82,17.14
S$622  (via drill 1 pad 1.93)
  other vias: 36.9,17.14
S$623  (via drill 1 pad 1.93)
  other vias: 44.52,17.14
S$624  (via drill 1 pad 1.93)
  other vias: 41.98,17.14
S$625  (via drill 1 pad 1.93)
  other vias: 49.6,17.14
S$626  (via drill 1 pad 1.93)
  other vias: 54.68,17.14
S$627  (via drill 1 pad 1.93)
  other vias: 59.76,17.14
S$628  (via drill 1 pad 1.93)
  other vias: 62.3,17.14
S$629  (via drill 1 pad 1.93)
  other vias: 21.66,75.56
S$630  (via drill 1 pad 1.93)
  other vias: 24.2,75.56
S$631  (via drill 1 pad 1.93)
  other vias: 29.28,75.56
S$632  (via drill 1 pad 1.93)
  other vias: 31.82,75.56
S$633  (via drill 1 pad 1.93)
  other vias: 36.9,75.56
S$634  (via drill 1 pad 1.93)
  other vias: 26.74,75.56
S$635  (via drill 1 pad 1.93)
  other vias: 34.36,75.56
S$636  (via drill 1 pad 1.93)
  other vias: 39.44,75.56
S$637  (via drill 1 pad 1.93)
  other vias: 44.52,75.56
S$638  (via drill 1 pad 1.93)
  other vias: 49.6,75.56
S$639  (via drill 1 pad 1.93)
  other vias: 41.98,75.56
S$640  (via drill 1 pad 1.93)
  other vias: 47.06,75.56
S$641  (via drill 1 pad 1.93)
  other vias: 52.14,75.56
S$642  (via drill 1 pad 1.93)
  other vias: 57.22,75.56
S$643  (via drill 1 pad 1.93)
  other vias: 57.22,73.02
S$644  (via drill 1 pad 1.93)
  other vias: 57.22,70.48
S$645  (via drill 1 pad 1.93)
  other vias: 57.22,67.94
S$646  (via drill 1 pad 1.93)
  other vias: 59.76,67.94
S$647  (via drill 1 pad 1.93)
  other vias: 64.84,67.94
S$648  (via drill 1 pad 1.93)
  other vias: 67.38,67.94
S$649  (via drill 1 pad 1.93)
  other vias: 62.3,67.94
S$650  (via drill 1 pad 1.93)
  other vias: 69.92,67.94
S$652  (via drill 1 pad 1.93)
  other vias: 72.46,67.94
S$653  (via drill 1 pad 1.93)
  other vias: 77.54,67.94
S$654  (via drill 1 pad 1.93)
  other vias: 80.08,67.94
S$655  (via drill 1 pad 1.93)
  other vias: 82.62,67.94
S$656  (via drill 1 pad 1.93)
  other vias: 85.16,67.94
S$657  (via drill 1 pad 1.93)
  other vias: 87.7,67.94
S$658  (via drill 1 pad 1.93)
  other vias: 90.24,67.94
S$659  (via drill 1 pad 1.93)
  other vias: 92.78,67.94
S$660  (via drill 1 pad 1.93)
  other vias: 92.78,70.48
S$661  (via drill 1 pad 1.93)
  other vias: 92.78,73.02
S$662  (via drill 1 pad 1.93)
  other vias: 95.32,75.56
S$663  (via drill 1 pad 1.93)
  other vias: 92.78,75.56
S$664  (via drill 1 pad 1.93)
  other vias: 97.86,75.56
S$665  (via drill 1 pad 1.93)
  other vias: 97.86,73.02
S$666  (via drill 1 pad 1.93)
  other vias: 21.66,73.02
S$667  (via drill 1 pad 1.93)
  other vias: 24.2,70.48
S$668  (via drill 1 pad 1.93)
  other vias: 21.66,70.48
S$669  (via drill 1 pad 1.93)
  other vias: 21.66,67.94
S$670  (via drill 1 pad 1.93)
  other vias: 24.2,67.94
S$671  (via drill 1 pad 1.93)
  other vias: 21.66,65.4
S$672  (via drill 1 pad 1.93)
  other vias: 24.2,65.4
S$673  (via drill 1 pad 1.93)
  other vias: 24.2,62.86
S$674  (via drill 1 pad 1.93)
  other vias: 21.66,62.86
S$675  (via drill 1 pad 1.93)
  other vias: 21.66,60.32
S$676  (via drill 1 pad 1.93)
  other vias: 24.2,60.32
S$677  (via drill 1 pad 1.93)
  other vias: 24.2,57.78
S$678  (via drill 1 pad 1.93)
  other vias: 21.66,57.78
S$679  (via drill 1 pad 1.93)
  other vias: 21.66,55.24
S$680  (via drill 1 pad 1.93)
  other vias: 24.2,55.24
S$681  (via drill 1 pad 1.93)
  other vias: 24.2,52.7
S$682  (via drill 1 pad 1.93)
  other vias: 21.66,52.7
S$683  (via drill 1 pad 1.93)
  other vias: 21.66,50.16
S$684  (via drill 1 pad 1.93)
  other vias: 24.2,50.16
S$685  (via drill 1 pad 1.93)
  other vias: 24.2,47.62
S$686  (via drill 1 pad 1.93)
  other vias: 21.66,47.62
S$687  (via drill 1 pad 1.93)
  other vias: 24.2,73.02
S$688  (via drill 1 pad 1.93)
  other vias: 26.74,73.02
S$689  (via drill 1 pad 1.93)
  other vias: 26.74,70.48
S$690  (via drill 1 pad 1.93)
  other vias: 26.74,67.94
S$691  (via drill 1 pad 1.93)
  other vias: 26.74,65.4
S$692  (via drill 1 pad 1.93)
  other vias: 26.74,62.86
S$693  (via drill 1 pad 1.93)
  other vias: 26.74,60.32
S$694  (via drill 1 pad 1.93)
  other vias: 26.74,57.78
S$695  (via drill 1 pad 1.93)
  other vias: 26.74,55.24
S$696  (via drill 1 pad 1.93)
  other vias: 26.74,52.7
S$697  (via drill 1 pad 1.93)
  other vias: 26.74,47.62
S$698  (via drill 1 pad 1.93)
  other vias: 26.74,50.16
S$699  (via drill 1 pad 1.93)
  other vias: 29.28,50.16
S$700  (via drill 1 pad 1.93)
  other vias: 29.28,52.7
S$701  (via drill 1 pad 1.93)
  other vias: 29.28,55.24
S$702  (via drill 1 pad 1.93)
  other vias: 29.28,57.78
S$703  (via drill 1 pad 1.93)
  other vias: 29.28,60.32
S$704  (via drill 1 pad 1.93)
  other vias: 29.28,62.86
S$705  (via drill 1 pad 1.93)
  other vias: 29.28,65.4
S$706  (via drill 1 pad 1.93)
  other vias: 29.28,67.94
S$707  (via drill 1 pad 1.93)
  other vias: 29.28,70.48
S$708  (via drill 1 pad 1.93)
  other vias: 29.28,73.02
S$709  (via drill 1 pad 1.93)
  other vias: 31.82,73.02
S$710  (via drill 1 pad 1.93)
  other vias: 31.82,70.48
S$711  (via drill 1 pad 1.93)
  other vias: 31.82,67.94
S$712  (via drill 1 pad 1.93)
  other vias: 31.82,65.4
S$713  (via drill 1 pad 1.93)
  other vias: 31.82,62.86
S$714  (via drill 1 pad 1.93)
  other vias: 31.82,57.78
S$715  (via drill 1 pad 1.93)
  other vias: 31.82,60.32
S$716  (via drill 1 pad 1.93)
  other vias: 31.82,55.24
S$717  (via drill 1 pad 1.93)
  other vias: 31.82,52.7
S$718  (via drill 1 pad 1.93)
  other vias: 31.82,50.16
S$719  (via drill 1 pad 1.93)
  other vias: 31.82,47.62
S$720  (via drill 1 pad 1.93)
  other vias: 29.28,47.62
S$721  (via drill 1 pad 1.93)
  other vias: 34.36,47.62
S$722  (via drill 1 pad 1.93)
  other vias: 34.36,50.16
S$723  (via drill 1 pad 1.93)
  other vias: 34.36,52.7
S$724  (via drill 1 pad 1.93)
  other vias: 34.36,55.24
S$725  (via drill 1 pad 1.93)
  other vias: 34.36,57.78
S$726  (via drill 1 pad 1.93)
  other vias: 34.36,60.32
S$727  (via drill 1 pad 1.93)
  other vias: 34.36,62.86
S$728  (via drill 1 pad 1.93)
  other vias: 34.36,67.94
S$729  (via drill 1 pad 1.93)
  other vias: 34.36,65.4
S$730  (via drill 1 pad 1.93)
  other vias: 34.36,70.48
S$731  (via drill 1 pad 1.93)
  other vias: 34.36,73.02
S$732  (via drill 1 pad 1.93)
  other vias: 36.9,73.02
S$733  (via drill 1 pad 1.93)
  other vias: 36.9,70.48
S$734  (via drill 1 pad 1.93)
  other vias: 36.9,67.94
S$735  (via drill 1 pad 1.93)
  other vias: 36.9,65.4
S$736  (via drill 1 pad 1.93)
  other vias: 36.9,62.86
S$737  (via drill 1 pad 1.93)
  other vias: 36.9,60.32
S$738  (via drill 1 pad 1.93)
  other vias: 36.9,57.78
S$739  (via drill 1 pad 1.93)
  other vias: 36.9,55.24
S$740  (via drill 1 pad 1.93)
  other vias: 39.44,52.7
S$741  (via drill 1 pad 1.93)
  other vias: 36.9,52.7
S$742  (via drill 1 pad 1.93)
  other vias: 36.9,50.16
S$743  (via drill 1 pad 1.93)
  other vias: 36.9,47.62
S$744  (via drill 1 pad 1.93)
  other vias: 39.44,47.62
S$745  (via drill 1 pad 1.93)
  other vias: 39.44,50.16
S$746  (via drill 1 pad 1.93)
  other vias: 39.44,55.24
S$747  (via drill 1 pad 1.93)
  other vias: 39.44,60.32
S$748  (via drill 1 pad 1.93)
  other vias: 39.44,62.86
S$749  (via drill 1 pad 1.93)
  other vias: 39.44,67.94
S$750  (via drill 1 pad 1.93)
  other vias: 39.44,70.48
S$751  (via drill 1 pad 1.93)
  other vias: 39.44,73.02
S$752  (via drill 1 pad 1.93)
  other vias: 39.44,65.4
S$753  (via drill 1 pad 1.93)
  other vias: 39.44,57.78
S$754  (via drill 1 pad 1.93)
  other vias: 41.98,73.02
S$755  (via drill 1 pad 1.93)
  other vias: 47.06,73.02
S$756  (via drill 1 pad 1.93)
  other vias: 49.6,73.02
S$757  (via drill 1 pad 1.93)
  other vias: 52.14,73.02
S$758  (via drill 1 pad 1.93)
  other vias: 54.68,73.02
S$759  (via drill 1 pad 1.93)
  other vias: 54.68,75.56
S$760  (via drill 1 pad 1.93)
  other vias: 44.52,73.02
S$761  (via drill 1 pad 1.93)
  other vias: 41.98,70.48
S$762  (via drill 1 pad 1.93)
  other vias: 47.06,70.48
S$763  (via drill 1 pad 1.93)
  other vias: 52.14,70.48
S$764  (via drill 1 pad 1.93)
  other vias: 54.68,70.48
S$765  (via drill 1 pad 1.93)
  other vias: 54.68,67.94
S$766  (via drill 1 pad 1.93)
  other vias: 52.14,67.94
S$767  (via drill 1 pad 1.93)
  other vias: 49.6,70.48
S$768  (via drill 1 pad 1.93)
  other vias: 49.6,67.94
S$769  (via drill 1 pad 1.93)
  other vias: 44.52,67.94
S$770  (via drill 1 pad 1.93)
  other vias: 44.52,70.48
S$771  (via drill 1 pad 1.93)
  other vias: 47.06,67.94
S$772  (via drill 1 pad 1.93)
  other vias: 41.98,67.94
S$773  (via drill 1 pad 1.93)
  other vias: 41.98,65.4
S$774  (via drill 1 pad 1.93)
  other vias: 44.52,65.4
S$775  (via drill 1 pad 1.93)
  other vias: 49.6,65.4
S$776  (via drill 1 pad 1.93)
  other vias: 52.14,65.4
S$777  (via drill 1 pad 1.93)
  other vias: 54.68,65.4
S$778  (via drill 1 pad 1.93)
  other vias: 57.22,62.86
S$779  (via drill 1 pad 1.93)
  other vias: 52.14,60.32
S$780  (via drill 1 pad 1.93)
  other vias: 47.06,62.86
S$781  (via drill 1 pad 1.93)
  other vias: 41.98,57.78
S$782  (via drill 1 pad 1.93)
  other vias: 44.52,55.24
S$783  (via drill 1 pad 1.93)
  other vias: 47.06,55.24
S$784  (via drill 1 pad 1.93)
  other vias: 57.22,52.7
S$785  (via drill 1 pad 1.93)
  other vias: 62.3,50.16
S$786  (via drill 1 pad 1.93)
  other vias: 49.6,47.62
S$787  (via drill 1 pad 1.93)
  other vias: 52.14,52.7
S$788  (via drill 1 pad 1.93)
  other vias: 52.14,57.78
S$789  (via drill 1 pad 1.93)
  other vias: 57.22,57.78
S$790  (via drill 1 pad 1.93)
  other vias: 59.76,57.78
S$791  (via drill 1 pad 1.93)
  other vias: 62.3,55.24
S$792  (via drill 1 pad 1.93)
  other vias: 59.76,52.7
S$793  (via drill 1 pad 1.93)
  other vias: 57.22,47.62
S$794  (via drill 1 pad 1.93)
  other vias: 54.68,47.62
S$795  (via drill 1 pad 1.93)
  other vias: 47.06,50.16
S$796  (via drill 1 pad 1.93)
  other vias: 41.98,50.16
S$797  (via drill 1 pad 1.93)
  other vias: 41.98,47.62
S$798  (via drill 1 pad 1.93)
  other vias: 44.52,45.08
S$799  (via drill 1 pad 1.93)
  other vias: 49.6,45.08
S$800  (via drill 1 pad 1.93)
  other vias: 57.22,45.08
S$801  (via drill 1 pad 1.93)
  other vias: 62.3,45.08
S$802  (via drill 1 pad 1.93)
  other vias: 59.76,47.62
S$803  (via drill 1 pad 1.93)
  other vias: 54.68,50.16
S$804  (via drill 1 pad 1.93)
  other vias: 52.14,50.16
S$805  (via drill 1 pad 1.93)
  other vias: 49.6,52.7
S$806  (via drill 1 pad 1.93)
  other vias: 49.6,55.24
S$807  (via drill 1 pad 1.93)
  other vias: 49.6,60.32
S$808  (via drill 1 pad 1.93)
  other vias: 44.52,60.32
S$809  (via drill 1 pad 1.93)
  other vias: 44.52,62.86
S$810  (via drill 1 pad 1.93)
  other vias: 41.98,62.86
S$811  (via drill 1 pad 1.93)
  other vias: 41.98,60.32
S$812  (via drill 1 pad 1.93)
  other vias: 47.06,65.4
S$813  (via drill 1 pad 1.93)
  other vias: 44.52,57.78
S$814  (via drill 1 pad 1.93)
  other vias: 47.06,60.32
S$815  (via drill 1 pad 1.93)
  other vias: 47.06,57.78
S$816  (via drill 1 pad 1.93)
  other vias: 49.6,57.78
S$817  (via drill 1 pad 1.93)
  other vias: 49.6,62.86
S$818  (via drill 1 pad 1.93)
  other vias: 52.14,62.86
S$819  (via drill 1 pad 1.93)
  other vias: 54.68,62.86
S$820  (via drill 1 pad 1.93)
  other vias: 54.68,60.32
S$821  (via drill 1 pad 1.93)
  other vias: 54.68,57.78
S$822  (via drill 1 pad 1.93)
  other vias: 54.68,55.24
S$823  (via drill 1 pad 1.93)
  other vias: 52.14,55.24
S$824  (via drill 1 pad 1.93)
  other vias: 41.98,55.24
S$825  (via drill 1 pad 1.93)
  other vias: 41.98,52.7
S$826  (via drill 1 pad 1.93)
  other vias: 44.52,52.7
S$827  (via drill 1 pad 1.93)
  other vias: 47.06,52.7
S$828  (via drill 1 pad 1.93)
  other vias: 44.52,50.16
S$829  (via drill 1 pad 1.93)
  other vias: 44.52,47.62
S$830  (via drill 1 pad 1.93)
  other vias: 47.06,47.62
S$831  (via drill 1 pad 1.93)
  other vias: 47.06,45.08
S$832  (via drill 1 pad 1.93)
  other vias: 49.6,50.16
S$833  (via drill 1 pad 1.93)
  other vias: 52.14,47.62
S$834  (via drill 1 pad 1.93)
  other vias: 54.68,45.08
S$835  (via drill 1 pad 1.93)
  other vias: 52.14,45.08
S$836  (via drill 1 pad 1.93)
  other vias: 54.68,52.7
S$837  (via drill 1 pad 1.93)
  other vias: 57.22,55.24
S$838  (via drill 1 pad 1.93)
  other vias: 59.76,55.24
S$839  (via drill 1 pad 1.93)
  other vias: 62.3,52.7
S$840  (via drill 1 pad 1.93)
  other vias: 59.76,50.16
S$841  (via drill 1 pad 1.93)
  other vias: 57.22,50.16
S$842  (via drill 1 pad 1.93)
  other vias: 62.3,47.62
S$843  (via drill 1 pad 1.93)
  other vias: 59.76,45.08
S$844  (via drill 1 pad 1.93)
  other vias: 57.22,60.32
S$845  (via drill 1 pad 1.93)
  other vias: 59.76,60.32
S$846  (via drill 1 pad 1.93)
  other vias: 62.3,60.32
S$847  (via drill 1 pad 1.93)
  other vias: 62.3,57.78
S$848  (via drill 1 pad 1.93)
  other vias: 59.76,62.86
S$849  (via drill 1 pad 1.93)
  other vias: 62.3,62.86
S$850  (via drill 1 pad 1.93)
  other vias: 62.3,65.4
S$851  (via drill 1 pad 1.93)
  other vias: 59.76,65.4
S$852  (via drill 1 pad 1.93)
  other vias: 57.22,65.4
S$853  (via drill 1 pad 1.93)
  other vias: 24.2,9.52
S$854  (via drill 1 pad 1.93)
  other vias: 24.2,6.98
S$855  (via drill 1 pad 1.93)
  other vias: 26.74,6.98
S$856  (via drill 1 pad 1.93)
  other vias: 29.28,6.98
S$857  (via drill 1 pad 1.93)
  other vias: 34.36,6.98
S$858  (via drill 1 pad 1.93)
  other vias: 39.44,6.98
S$859  (via drill 1 pad 1.93)
  other vias: 44.52,6.98
S$860  (via drill 1 pad 1.93)
  other vias: 47.06,6.98
S$861  (via drill 1 pad 1.93)
  other vias: 47.06,9.52
S$862  (via drill 1 pad 1.93)
  other vias: 47.06,12.06
S$863  (via drill 1 pad 1.93)
  other vias: 47.06,14.6
S$864  (via drill 1 pad 1.93)
  other vias: 31.82,6.98
S$865  (via drill 1 pad 1.93)
  other vias: 36.9,6.98
S$866  (via drill 1 pad 1.93)
  other vias: 41.98,6.98
S$867  (via drill 1 pad 1.93)
  other vias: 44.52,9.52
S$868  (via drill 1 pad 1.93)
  other vias: 44.52,14.6
S$869  (via drill 1 pad 1.93)
  other vias: 39.44,14.6
S$870  (via drill 1 pad 1.93)
  other vias: 29.28,12.06
S$871  (via drill 1 pad 1.93)
  other vias: 26.74,12.06
S$872  (via drill 1 pad 1.93)
  other vias: 34.36,12.06
S$873  (via drill 1 pad 1.93)
  other vias: 31.82,9.52
S$874  (via drill 1 pad 1.93)
  other vias: 29.28,9.52
S$875  (via drill 1 pad 1.93)
  other vias: 26.74,9.52
S$876  (via drill 1 pad 1.93)
  other vias: 24.2,12.06
S$877  (via drill 1 pad 1.93)
  other vias: 24.2,14.6
S$878  (via drill 1 pad 1.93)
  other vias: 26.74,14.6
S$879  (via drill 1 pad 1.93)
  other vias: 29.28,14.6
S$880  (via drill 1 pad 1.93)
  other vias: 31.82,14.6
S$881  (via drill 1 pad 1.93)
  other vias: 31.82,12.06
S$882  (via drill 1 pad 1.93)
  other vias: 34.36,9.52
S$883  (via drill 1 pad 1.93)
  other vias: 34.36,14.6
S$884  (via drill 1 pad 1.93)
  other vias: 36.9,14.6
S$885  (via drill 1 pad 1.93)
  other vias: 36.9,12.06
S$886  (via drill 1 pad 1.93)
  other vias: 36.9,9.52
S$887  (via drill 1 pad 1.93)
  other vias: 41.98,9.52
S$888  (via drill 1 pad 1.93)
  other vias: 39.44,9.52
S$889  (via drill 1 pad 1.93)
  other vias: 39.44,12.06
S$890  (via drill 1 pad 1.93)
  other vias: 41.98,12.06
S$891  (via drill 1 pad 1.93)
  other vias: 41.98,14.6
S$892  (via drill 1 pad 1.93)
  other vias: 44.52,12.06
S$893  (via drill 1 pad 1.93)
  other vias: 133.42,52.7
S$894  (via drill 1 pad 1.93)
  other vias: 110.56,65.4
S$895  (via drill 1 pad 1.93)
  other vias: 97.86,57.78
S$896  (via drill 1 pad 1.93)
  other vias: 90.24,57.78
S$897  (via drill 1 pad 1.93)
  other vias: 82.62,55.24
S$898  (via drill 1 pad 1.93)
  other vias: 77.54,52.7
S$899  (via drill 1 pad 1.93)